# Altium PCB SolenoidController.PcbDoc
Units mil, origin at the board's own origin, x right, y up, seen from the top; angles counter-clockwise.
Board outline 2600 x 4550 mil, 2 copper layers (Top Layer, Bottom Layer); 77 components, 52 nets, 209 pads, 0 vias.
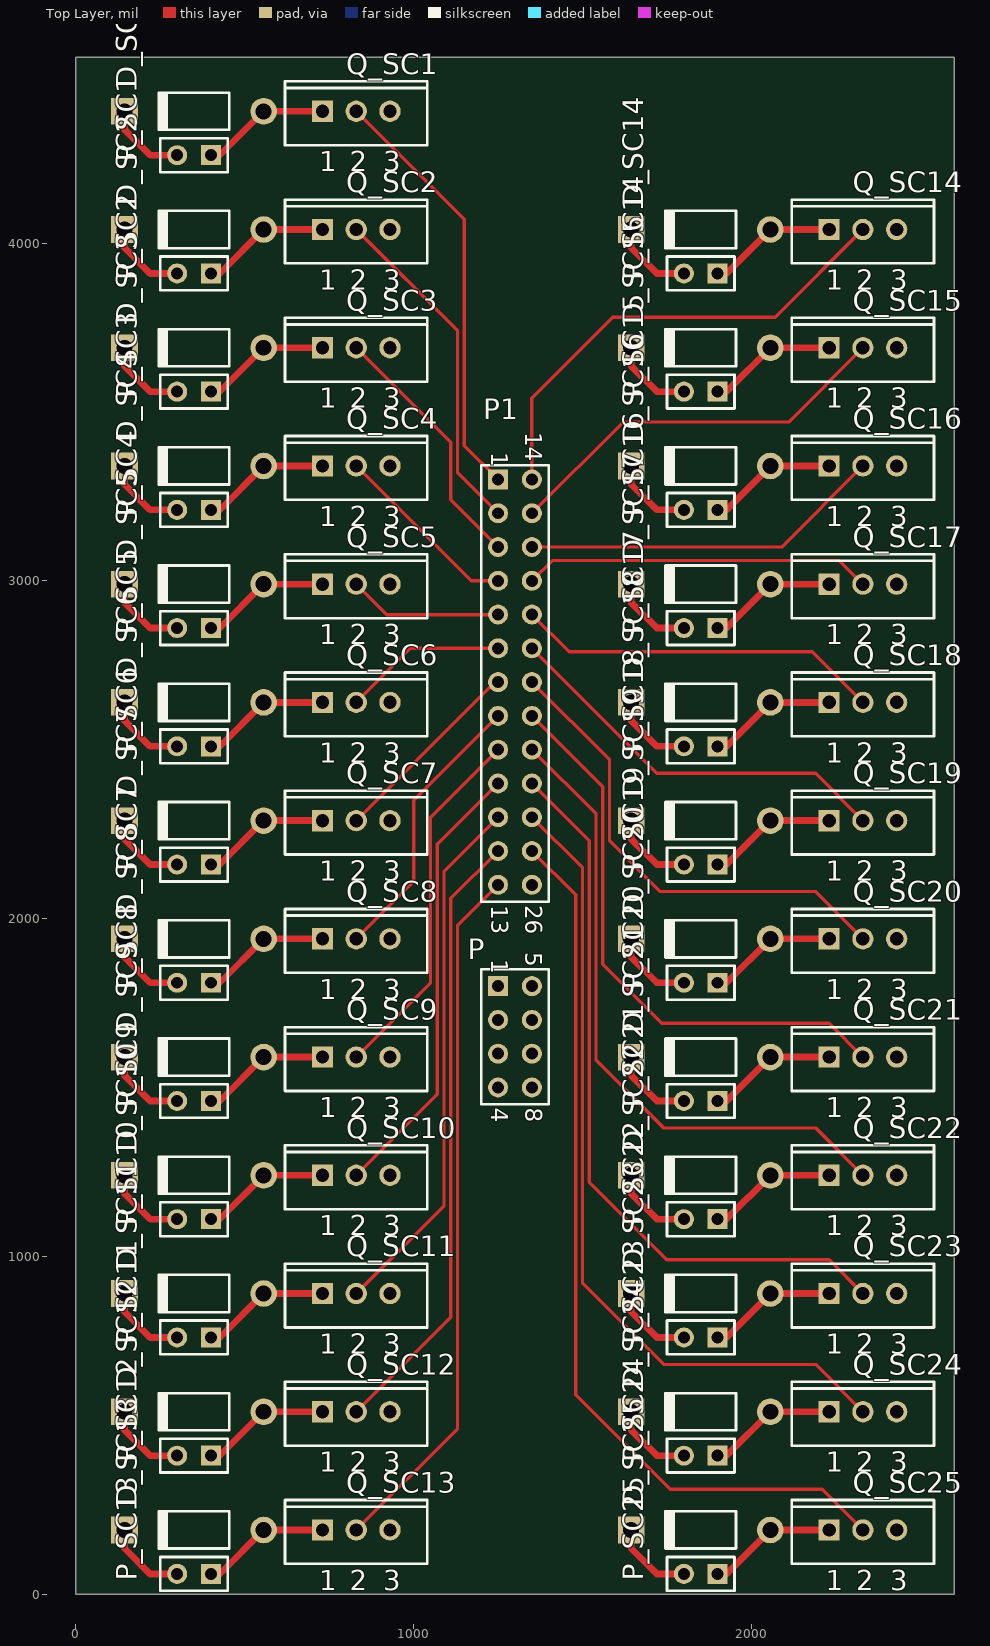
[diagram p0: Top Layer view]
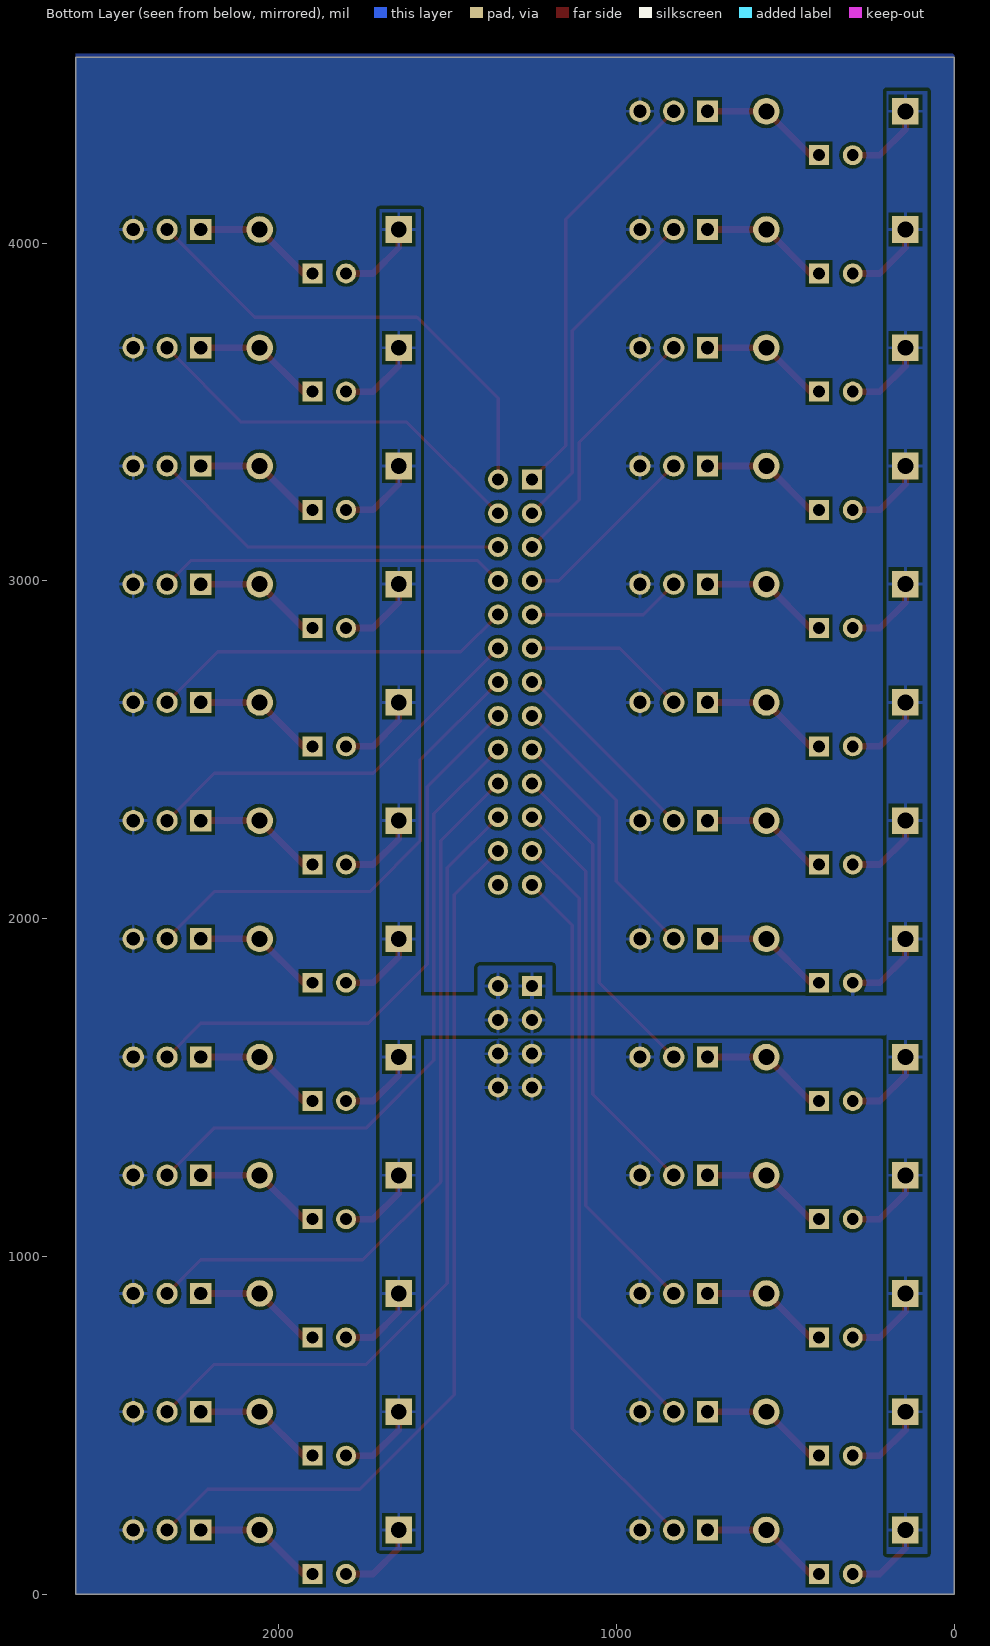
[diagram p1: Bottom Layer view, seen from below]

## Layer stack, top to bottom
Top Solder: solder mask 0.4, Solder Resist, Dk 3.5
Top Layer: signal copper 1.4
Dielectric 1: dielectric 12.6, FR-4, Dk 4.8
Bottom Layer: signal copper 1.4
Bottom Solder: solder mask 0.4, Solder Resist, Dk 3.5

## Board outline
0,0 2600,0 2600,4550 0,4550

## Design rules (kind name [scope] priority, off if disabled: settings)
Clearance [All] p1: gap=10
PolygonConnect [All] p1: connectstyle=Relief reliefconductorwidth=10 reliefentries=4 polygonreliefangle="90 Angle" airgapwidth=10
RoomDefinition topcontroller [InComponentClass('topcontroller')] p1: confinementstyle=ConfineIn formatcopy=TRUE lockcomponents=FALSE outline 1500,3500 1050,3500 1050,1350 1500,1350
RoomDefinition SC25 [InComponentClass('SC25')] p2: confinementstyle=ConfineIn formatcopy=TRUE lockcomponents=FALSE outline 1500,0 2550,0 2550,350 1500,350
RoomDefinition SC24 [InComponentClass('SC24')] p3: confinementstyle=ConfineIn formatcopy=TRUE lockcomponents=FALSE outline 1500,350 2550,350 2550,700 1500,700
RoomDefinition SC23 [InComponentClass('SC23')] p4: confinementstyle=ConfineIn formatcopy=TRUE lockcomponents=FALSE outline 1500,700 2550,700 2550,1050 1500,1050
RoomDefinition SC22 [InComponentClass('SC22')] p5: confinementstyle=ConfineIn formatcopy=TRUE lockcomponents=FALSE outline 1500,1050 2550,1050 2550,1400 1500,1400
RoomDefinition SC21 [InComponentClass('SC21')] p6: confinementstyle=ConfineIn formatcopy=TRUE lockcomponents=FALSE outline 1500,1400 2550,1400 2550,1750 1500,1750
RoomDefinition SC20 [InComponentClass('SC20')] p7: confinementstyle=ConfineIn formatcopy=TRUE lockcomponents=FALSE outline 1500,1750 2550,1750 2550,2100 1500,2100
RoomDefinition SC19 [InComponentClass('SC19')] p8: confinementstyle=ConfineIn formatcopy=TRUE lockcomponents=FALSE outline 1500,2100 2550,2100 2550,2450 1500,2450
RoomDefinition SC18 [InComponentClass('SC18')] p9: confinementstyle=ConfineIn formatcopy=TRUE lockcomponents=FALSE outline 1500,2450 2550,2450 2550,2800 1500,2800
RoomDefinition SC17 [InComponentClass('SC17')] p10: confinementstyle=ConfineIn formatcopy=TRUE lockcomponents=FALSE outline 1500,2800 2550,2800 2550,3150 1500,3150
RoomDefinition SC16 [InComponentClass('SC16')] p11: confinementstyle=ConfineIn formatcopy=TRUE lockcomponents=FALSE outline 1500,3150 2550,3150 2550,3500 1500,3500
RoomDefinition SC15 [InComponentClass('SC15')] p12: confinementstyle=ConfineIn formatcopy=TRUE lockcomponents=FALSE outline 1500,3500 2550,3500 2550,3850 1500,3850
RoomDefinition SC14 [InComponentClass('SC14')] p13: confinementstyle=ConfineIn formatcopy=TRUE lockcomponents=FALSE outline 1500,3850 2550,3850 2550,4200 1500,4200
RoomDefinition SC13 [InComponentClass('SC13')] p14: confinementstyle=ConfineIn formatcopy=TRUE lockcomponents=FALSE outline 0,0 1050,0 1050,350 0,350
RoomDefinition SC12 [InComponentClass('SC12')] p15: confinementstyle=ConfineIn formatcopy=TRUE lockcomponents=FALSE outline 0,350 1050,350 1050,700 0,700
RoomDefinition SC11 [InComponentClass('SC11')] p16: confinementstyle=ConfineIn formatcopy=TRUE lockcomponents=FALSE outline 0,700 1050,700 1050,1050 0,1050
RoomDefinition SC10 [InComponentClass('SC10')] p17: confinementstyle=ConfineIn formatcopy=TRUE lockcomponents=FALSE outline 0,1050 1050,1050 1050,1400 0,1400
RoomDefinition SC9 [InComponentClass('SC9')] p18: confinementstyle=ConfineIn formatcopy=TRUE lockcomponents=FALSE outline 0,1400 1050,1400 1050,1750 0,1750
RoomDefinition SC8 [InComponentClass('SC8')] p19: confinementstyle=ConfineIn formatcopy=TRUE lockcomponents=FALSE outline 0,1750 1050,1750 1050,2100 0,2100
RoomDefinition SC7 [InComponentClass('SC7')] p20: confinementstyle=ConfineIn formatcopy=TRUE lockcomponents=FALSE outline 0,2100 1050,2100 1050,2450 0,2450
RoomDefinition SC6 [InComponentClass('SC6')] p21: confinementstyle=ConfineIn formatcopy=TRUE lockcomponents=FALSE outline 0,2450 1050,2450 1050,2800 0,2800
RoomDefinition SC5 [InComponentClass('SC5')] p22: confinementstyle=ConfineIn formatcopy=TRUE lockcomponents=FALSE outline 0,2800 1050,2800 1050,3150 0,3150
RoomDefinition SC4 [InComponentClass('SC4')] p23: confinementstyle=ConfineIn formatcopy=TRUE lockcomponents=FALSE outline 0,3150 1050,3150 1050,3500 0,3500
RoomDefinition SC3 [InComponentClass('SC3')] p24: confinementstyle=ConfineIn formatcopy=TRUE lockcomponents=FALSE outline 0,3500 1050,3500 1050,3850 0,3850
RoomDefinition SC2 [InComponentClass('SC2')] p25: confinementstyle=ConfineIn formatcopy=TRUE lockcomponents=FALSE outline 0,3850 1050,3850 1050,4200 0,4200
RoomDefinition SC1 [InComponentClass('SC1')] p26: confinementstyle=ConfineIn formatcopy=TRUE lockcomponents=FALSE outline 0,4200 1050,4200 1050,4550 0,4550
RoutingVias [All] p1: holewidth=28 width=50 viastyle="Through Hole" minholewidth=28 minwidth=50 maxholewidth=28 maxwidth=50
SolderMaskExpansion [All] p1: expansion=4
Width [All] p1: maxlimit=20 minlimit=10 preferedwidth=10 minimp=50.000000 maximp=50.000000 favimp=50.000000
30 further rules are at their usual default settings.

## Classes and differential pairs
channel class transistormodule: SC1 SC2 SC3 SC4 SC5 SC6 SC7 SC8 SC9 SC10 SC11 SC12 SC13 SC14 SC15 SC16 SC17 SC18 SC19 SC20 SC21 SC22 SC23 SC24 SC25
net class S[1..25]: S1 S2 S3 S4 S5 S6 S7 S8 S9 S10 S11 S12 S13 S14 S15 S16 S17 S18 S19 S20 S21 S22 S23 S24 S25
component class topcontroller: P P1
component class SC25: D_SC25 P_SC25 Q_SC25
component class SC24: D_SC24 P_SC24 Q_SC24
component class SC23: D_SC23 P_SC23 Q_SC23
component class SC22: D_SC22 P_SC22 Q_SC22
component class SC21: D_SC21 P_SC21 Q_SC21
component class SC20: D_SC20 P_SC20 Q_SC20
component class SC19: D_SC19 P_SC19 Q_SC19
component class SC18: D_SC18 P_SC18 Q_SC18
component class SC17: D_SC17 P_SC17 Q_SC17
component class SC16: D_SC16 P_SC16 Q_SC16
component class SC15: D_SC15 P_SC15 Q_SC15
component class SC14: D_SC14 P_SC14 Q_SC14
component class SC13: D_SC13 P_SC13 Q_SC13
component class SC12: D_SC12 P_SC12 Q_SC12
component class SC11: D_SC11 P_SC11 Q_SC11
component class SC10: D_SC10 P_SC10 Q_SC10
component class SC9: D_SC9 P_SC9 Q_SC9
component class SC8: D_SC8 P_SC8 Q_SC8
component class SC7: D_SC7 P_SC7 Q_SC7
component class SC6: D_SC6 P_SC6 Q_SC6
component class SC5: D_SC5 P_SC5 Q_SC5
component class SC4: D_SC4 P_SC4 Q_SC4
component class SC3: D_SC3 P_SC3 Q_SC3
component class SC2: D_SC2 P_SC2 Q_SC2
component class SC1: D_SC1 P_SC1 Q_SC1

## Components (designator, comment, footprint, x,y, rotation, side; value= is the part's Value field where it differs from the comment)
D_SC1 "Diode 1N4004" DO-41 350,4390 r180 top (schematic designator D)
D_SC2 "Diode 1N4004" DO-41 350,4040 r180 top (schematic designator D)
D_SC3 "Diode 1N4004" DO-41 350,3690 r180 top (schematic designator D)
D_SC4 "Diode 1N4004" DO-41 350,3340 r180 top (schematic designator D)
D_SC5 "Diode 1N4004" DO-41 350,2990 r180 top (schematic designator D)
D_SC6 "Diode 1N4004" DO-41 350,2640 r180 top (schematic designator D)
D_SC7 "Diode 1N4004" DO-41 350,2290 r180 top (schematic designator D)
D_SC8 "Diode 1N4004" DO-41 350,1940 r180 top (schematic designator D)
D_SC9 "Diode 1N4004" DO-41 350,1590 r180 top (schematic designator D)
D_SC10 "Diode 1N4004" DO-41 350,1240 r180 top (schematic designator D)
D_SC11 "Diode 1N4004" DO-41 350,890 r180 top (schematic designator D)
D_SC12 "Diode 1N4004" DO-41 350,540 r180 top (schematic designator D)
D_SC13 "Diode 1N4004" DO-41 350,190 r180 top (schematic designator D)
D_SC14 "Diode 1N4004" DO-41 1850,4040 r180 top (schematic designator D)
D_SC15 "Diode 1N4004" DO-41 1850,3690 r180 top (schematic designator D)
D_SC16 "Diode 1N4004" DO-41 1850,3340 r180 top (schematic designator D)
D_SC17 "Diode 1N4004" DO-41 1850,2990 r180 top (schematic designator D)
D_SC18 "Diode 1N4004" DO-41 1850,2640 r180 top (schematic designator D)
D_SC19 "Diode 1N4004" DO-41 1850,2290 r180 top (schematic designator D)
D_SC20 "Diode 1N4004" DO-41 1850,1940 r180 top (schematic designator D)
D_SC21 "Diode 1N4004" DO-41 1850,1590 r180 top (schematic designator D)
D_SC22 "Diode 1N4004" DO-41 1850,1240 r180 top (schematic designator D)
D_SC23 "Diode 1N4004" DO-41 1850,890 r180 top (schematic designator D)
D_SC24 "Diode 1N4004" DO-41 1850,540 r180 top (schematic designator D)
D_SC25 "Diode 1N4004" DO-41 1850,190 r180 top (schematic designator D)
P "Header 4X2A" HDR2X4_CEN 1250,1800 r270 top
P1 "Header 13X2A" HDR2X13_CEN 1250,3300 r270 top
P_SC1 "Solenoid" HDR1X2 400,4260 r180 top (schematic designator P)
P_SC2 "Solenoid" HDR1X2 400,3910 r180 top (schematic designator P)
P_SC3 "Solenoid" HDR1X2 400,3560 r180 top (schematic designator P)
P_SC4 "Solenoid" HDR1X2 400,3210 r180 top (schematic designator P)
P_SC5 "Solenoid" HDR1X2 400,2860 r180 top (schematic designator P)
P_SC6 "Solenoid" HDR1X2 400,2510 r180 top (schematic designator P)
P_SC7 "Solenoid" HDR1X2 400,2160 r180 top (schematic designator P)
P_SC8 "Solenoid" HDR1X2 400,1810 r180 top (schematic designator P)
P_SC9 "Solenoid" HDR1X2 400,1460 r180 top (schematic designator P)
P_SC10 "Solenoid" HDR1X2 400,1110 r180 top (schematic designator P)
P_SC11 "Solenoid" HDR1X2 400,760 r180 top (schematic designator P)
P_SC12 "Solenoid" HDR1X2 400,410 r180 top (schematic designator P)
P_SC13 "Solenoid" HDR1X2 400,60 r180 top (schematic designator P)
P_SC14 "Solenoid" HDR1X2 1900,3910 r180 top (schematic designator P)
P_SC15 "Solenoid" HDR1X2 1900,3560 r180 top (schematic designator P)
P_SC16 "Solenoid" HDR1X2 1900,3210 r180 top (schematic designator P)
P_SC17 "Solenoid" HDR1X2 1900,2860 r180 top (schematic designator P)
P_SC18 "Solenoid" HDR1X2 1900,2510 r180 top (schematic designator P)
P_SC19 "Solenoid" HDR1X2 1900,2160 r180 top (schematic designator P)
P_SC20 "Solenoid" HDR1X2 1900,1810 r180 top (schematic designator P)
P_SC21 "Solenoid" HDR1X2 1900,1460 r180 top (schematic designator P)
P_SC22 "Solenoid" HDR1X2 1900,1110 r180 top (schematic designator P)
P_SC23 "Solenoid" HDR1X2 1900,760 r180 top (schematic designator P)
P_SC24 "Solenoid" HDR1X2 1900,410 r180 top (schematic designator P)
P_SC25 "Solenoid" HDR1X2 1900,60 r180 top (schematic designator P)
Q_SC1 "MOSFET-N" TO-220-AB 830,4390 r0 top (schematic designator Q)
Q_SC2 "MOSFET-N" TO-220-AB 830,4040 r0 top (schematic designator Q)
Q_SC3 "MOSFET-N" TO-220-AB 830,3690 r0 top (schematic designator Q)
Q_SC4 "MOSFET-N" TO-220-AB 830,3340 r0 top (schematic designator Q)
Q_SC5 "MOSFET-N" TO-220-AB 830,2990 r0 top (schematic designator Q)
Q_SC6 "MOSFET-N" TO-220-AB 830,2640 r0 top (schematic designator Q)
Q_SC7 "MOSFET-N" TO-220-AB 830,2290 r0 top (schematic designator Q)
Q_SC8 "MOSFET-N" TO-220-AB 830,1940 r0 top (schematic designator Q)
Q_SC9 "MOSFET-N" TO-220-AB 830,1590 r0 top (schematic designator Q)
Q_SC10 "MOSFET-N" TO-220-AB 830,1240 r0 top (schematic designator Q)
Q_SC11 "MOSFET-N" TO-220-AB 830,890 r0 top (schematic designator Q)
Q_SC12 "MOSFET-N" TO-220-AB 830,540 r0 top (schematic designator Q)
Q_SC13 "MOSFET-N" TO-220-AB 830,190 r0 top (schematic designator Q)
Q_SC14 "MOSFET-N" TO-220-AB 2330,4040 r0 top (schematic designator Q)
Q_SC15 "MOSFET-N" TO-220-AB 2330,3690 r0 top (schematic designator Q)
Q_SC16 "MOSFET-N" TO-220-AB 2330,3340 r0 top (schematic designator Q)
Q_SC17 "MOSFET-N" TO-220-AB 2330,2990 r0 top (schematic designator Q)
Q_SC18 "MOSFET-N" TO-220-AB 2330,2640 r0 top (schematic designator Q)
Q_SC19 "MOSFET-N" TO-220-AB 2330,2290 r0 top (schematic designator Q)
Q_SC20 "MOSFET-N" TO-220-AB 2330,1940 r0 top (schematic designator Q)
Q_SC21 "MOSFET-N" TO-220-AB 2330,1590 r0 top (schematic designator Q)
Q_SC22 "MOSFET-N" TO-220-AB 2330,1240 r0 top (schematic designator Q)
Q_SC23 "MOSFET-N" TO-220-AB 2330,890 r0 top (schematic designator Q)
Q_SC24 "MOSFET-N" TO-220-AB 2330,540 r0 top (schematic designator Q)
Q_SC25 "MOSFET-N" TO-220-AB 2330,190 r0 top (schematic designator Q)

## Footprints (in the part's own frame and the unit in brackets; to place one, negate y for a bottom-side part, rotate by r counter-clockwise, add the part's x,y. Pads: shape width x height; smd on the part's side, far side on the other; paste and mask are expansions set on the pad)
DO-41 [mm] "Diode, Axial; Body 5.2 x 2.7 mm (LxDia. max), Lead Dia. 0.86 mm (max)"
  round 2 hole 1.2: 1(-5.23,0)
  rect 2x2 hole 1.2: 2(5.23,0)
  silkscreen extent -2.65,-1.4 2.75,1.4
HDR1X2 [mm] "Connector; Header; 2 Position"
  rect 1.5x1.5 hole 0.9: 1(0,0)
  round 1.5 hole 0.9: 2(2.54,0)
  silkscreen extent -1.27,-1.27 3.81,1.27
HDR2X4_CEN [mm] "Connector; Header; 4x2 Position"
  rect 1.5x1.5 hole 0.9: 1(0,0)
  round 1.5 hole 0.9: 2(2.54,0) 3(5.08,0) 4(7.62,0) 5(0,2.54) 6(2.54,2.54) 7(5.08,2.54) 8(7.62,2.54)
  silkscreen extent -1.27,-1.27 8.89,3.81
HDR2X13_CEN [mm] "Connector; Header; 13x2 Position"
  rect 1.5x1.5 hole 0.9: 1(0,0)
  round 1.5 hole 0.9: 2(2.54,0) 3(5.08,0) 4(7.62,0) 5(10.16,0) 6(12.7,0) 7(15.24,0) 8(17.78,0) 9(20.32,0) 10(22.86,0) 11(25.4,0) 12(27.94,0) 13(30.48,0) 14(0,2.54) 15(2.54,2.54) 16(5.08,2.54) 17(7.62,2.54) 18(10.16,2.54) 19(12.7,2.54) 20(15.24,2.54) 21(17.78,2.54) 22(20.32,2.54) 23(22.86,2.54) 24(25.4,2.54) 25(27.94,2.54) 26(30.48,2.54)
  silkscreen extent -1.06,-1.27 31.75,3.81
TO-220-AB [mm] "TO, Thru-Hole, Vertical, Heatsink Mounted; 3 In-Line Leads; Pitch 2.54 mm"
  rect 1.6x1.6 hole 1: 1(-2.54,0)
  round 1.6 hole 1: 2(0,0) 3(2.54,0)
  silkscreen extent -5.35,-2.55 5.35,2.25

## Part data
D_SC1 D_SC2 D_SC3 D_SC4 D_SC5 D_SC6 D_SC7 D_SC8 D_SC9 D_SC10 D_SC11 D_SC12 D_SC13 D_SC14 D_SC15 D_SC16 D_SC17 D_SC18 D_SC19 D_SC20 D_SC21 D_SC22 D_SC23 D_SC24 D_SC25: "1 Amp General Purpose Rectifier"
P: "Header, 4-Pin, Dual row"
P1: "Header, 13-Pin, Dual row"
P_SC1 P_SC2 P_SC3 P_SC4 P_SC5 P_SC6 P_SC7 P_SC8 P_SC9 P_SC10 P_SC11 P_SC12 P_SC13 P_SC14 P_SC15 P_SC16 P_SC17 P_SC18 P_SC19 P_SC20 P_SC21 P_SC22 P_SC23 P_SC24 P_SC25: library part "Header 2", "Header, 2-Pin"
Q_SC1 Q_SC2 Q_SC3 Q_SC4 Q_SC5 Q_SC6 Q_SC7 Q_SC8 Q_SC9 Q_SC10 Q_SC11 Q_SC12 Q_SC13 Q_SC14 Q_SC15 Q_SC16 Q_SC17 Q_SC18 Q_SC19 Q_SC20 Q_SC21 Q_SC22 Q_SC23 Q_SC24 Q_SC25: "N-Channel MOSFET"

## Nets (pads, with @x,y where several pads share a name; then routed paths per layer and width w, separated by ;. In a path a pad name is that pad's centre, name@x,y a point inside that pad or via, vN(x,y) a via of type N, cw(c..) or ccw(c..) an arc to the next point about the centre after c; other vN are vias at no path point)
GND: P.3 P.4 P.7 P.8 Q_SC1.3 Q_SC2.3 Q_SC3.3 Q_SC4.3 Q_SC5.3 Q_SC6.3 Q_SC7.3 Q_SC8.3 Q_SC9.3 Q_SC10.3 Q_SC11.3 Q_SC12.3 Q_SC13.3 Q_SC14.3 Q_SC15.3 Q_SC16.3 Q_SC17.3 Q_SC18.3 Q_SC19.3 Q_SC20.3 Q_SC21.3 Q_SC22.3 Q_SC23.3 Q_SC24.3 Q_SC25.3
NetD_SC1_1: D_SC1.1 P_SC1.1 Q_SC1.1 | length 383.8
  Top Layer w20: P_SC1.1 425.91,4260 D_SC1.1 Q_SC1.1
NetD_SC2_1: D_SC2.1 P_SC2.1 Q_SC2.1 | length 383.8
  Top Layer w20: P_SC2.1 425.91,3910 D_SC2.1 Q_SC2.1
NetD_SC3_1: D_SC3.1 P_SC3.1 Q_SC3.1 | length 383.8
  Top Layer w20: P_SC3.1 425.91,3560 D_SC3.1 Q_SC3.1
NetD_SC4_1: D_SC4.1 P_SC4.1 Q_SC4.1 | length 383.8
  Top Layer w20: P_SC4.1 425.91,3210 D_SC4.1 Q_SC4.1
NetD_SC5_1: D_SC5.1 P_SC5.1 Q_SC5.1 | length 383.8
  Top Layer w20: P_SC5.1 425.91,2860 D_SC5.1 Q_SC5.1
NetD_SC6_1: D_SC6.1 P_SC6.1 Q_SC6.1 | length 383.8
  Top Layer w20: P_SC6.1 425.91,2510 D_SC6.1 Q_SC6.1
NetD_SC7_1: D_SC7.1 P_SC7.1 Q_SC7.1 | length 383.8
  Top Layer w20: P_SC7.1 425.91,2160 D_SC7.1 Q_SC7.1
NetD_SC8_1: D_SC8.1 P_SC8.1 Q_SC8.1 | length 383.8
  Top Layer w20: P_SC8.1 425.91,1810 D_SC8.1 Q_SC8.1
NetD_SC9_1: D_SC9.1 P_SC9.1 Q_SC9.1 | length 383.8
  Top Layer w20: P_SC9.1 425.91,1460 D_SC9.1 Q_SC9.1
NetD_SC10_1: D_SC10.1 P_SC10.1 Q_SC10.1 | length 383.8
  Top Layer w20: P_SC10.1 425.91,1110 D_SC10.1 Q_SC10.1
NetD_SC11_1: D_SC11.1 P_SC11.1 Q_SC11.1 | length 383.8
  Top Layer w20: P_SC11.1 425.91,760 D_SC11.1 Q_SC11.1
NetD_SC12_1: D_SC12.1 P_SC12.1 Q_SC12.1 | length 383.8
  Top Layer w20: P_SC12.1 425.91,410 D_SC12.1 Q_SC12.1
NetD_SC13_1: D_SC13.1 P_SC13.1 Q_SC13.1 | length 383.8
  Top Layer w20: P_SC13.1 425.91,60 D_SC13.1 Q_SC13.1
NetD_SC14_1: D_SC14.1 P_SC14.1 Q_SC14.1 | length 383.8
  Top Layer w20: P_SC14.1 1925.91,3910 D_SC14.1 Q_SC14.1
NetD_SC15_1: D_SC15.1 P_SC15.1 Q_SC15.1 | length 383.8
  Top Layer w20: P_SC15.1 1925.91,3560 D_SC15.1 Q_SC15.1
NetD_SC16_1: D_SC16.1 P_SC16.1 Q_SC16.1 | length 383.8
  Top Layer w20: P_SC16.1 1925.91,3210 D_SC16.1 Q_SC16.1
NetD_SC17_1: D_SC17.1 P_SC17.1 Q_SC17.1 | length 383.8
  Top Layer w20: P_SC17.1 1925.91,2860 D_SC17.1 Q_SC17.1
NetD_SC18_1: D_SC18.1 P_SC18.1 Q_SC18.1 | length 383.8
  Top Layer w20: P_SC18.1 1925.91,2510 D_SC18.1 Q_SC18.1
NetD_SC19_1: D_SC19.1 P_SC19.1 Q_SC19.1 | length 383.8
  Top Layer w20: P_SC19.1 1925.91,2160 D_SC19.1 Q_SC19.1
NetD_SC20_1: D_SC20.1 P_SC20.1 Q_SC20.1 | length 383.8
  Top Layer w20: P_SC20.1 1925.91,1810 D_SC20.1 Q_SC20.1
NetD_SC21_1: D_SC21.1 P_SC21.1 Q_SC21.1 | length 383.8
  Top Layer w20: P_SC21.1 1925.91,1460 D_SC21.1 Q_SC21.1
NetD_SC22_1: D_SC22.1 P_SC22.1 Q_SC22.1 | length 383.8
  Top Layer w20: P_SC22.1 1925.91,1110 D_SC22.1 Q_SC22.1
NetD_SC23_1: D_SC23.1 P_SC23.1 Q_SC23.1 | length 383.8
  Top Layer w20: P_SC23.1 1925.91,760 D_SC23.1 Q_SC23.1
NetD_SC24_1: D_SC24.1 P_SC24.1 Q_SC24.1 | length 383.8
  Top Layer w20: P_SC24.1 1925.91,410 D_SC24.1 Q_SC24.1
NetD_SC25_1: D_SC25.1 P_SC25.1 Q_SC25.1 | length 383.8
  Top Layer w20: P_SC25.1 1925.91,60 D_SC25.1 Q_SC25.1
PWR+: D_SC1.2 D_SC2.2 D_SC3.2 D_SC4.2 D_SC5.2 D_SC6.2 D_SC7.2 D_SC8.2 D_SC9.2 D_SC10.2 D_SC11.2 D_SC12.2 D_SC13.2 D_SC14.2 D_SC15.2 D_SC16.2 D_SC17.2 D_SC18.2 D_SC19.2 D_SC20.2 D_SC21.2 D_SC22.2 D_SC23.2 D_SC24.2 D_SC25.2 P.1 P.2 P.5 P.6 P_SC1.2 P_SC2.2 P_SC3.2 P_SC4.2 P_SC5.2 P_SC6.2 P_SC7.2 P_SC8.2 P_SC9.2 P_SC10.2 P_SC11.2 P_SC12.2 P_SC13.2 P_SC14.2 P_SC15.2 P_SC16.2 P_SC17.2 P_SC18.2 P_SC19.2 P_SC20.2 P_SC21.2 P_SC22.2 P_SC23.2 P_SC24.2 P_SC25.2 | length 6036
  Top Layer w20: D_SC13.2 144.09,135.91 220,60 P_SC13.2 ; D_SC12.2 144.09,485.91 220,410 P_SC12.2 ; D_SC11.2 144.09,835.91 220,760 P_SC11.2 ; D_SC10.2 144.09,1185.91 220,1110 P_SC10.2 ; D_SC9.2 144.09,1535.91 220,1460 P_SC9.2 ; D_SC8.2 144.09,1885.91 220,1810 P_SC8.2 ; D_SC7.2 144.09,2235.91 220,2160 P_SC7.2 ; D_SC6.2 144.09,2585.91 220,2510 P_SC6.2 ; D_SC5.2 144.09,2935.91 220,2860 P_SC5.2 ; D_SC4.2 144.09,3285.91 220,3210 P_SC4.2 ; D_SC3.2 144.09,3635.91 220,3560 P_SC3.2 ; D_SC2.2 144.09,3985.91 220,3910 P_SC2.2 ; D_SC1.2 144.09,4335.91 220,4260 P_SC1.2 ; D_SC25.2 1644.09,135.91 1720,60 P_SC25.2 ; D_SC24.2 1644.09,485.91 1720,410 P_SC24.2 ; D_SC23.2 1644.09,835.91 1720,760 P_SC23.2 ; D_SC22.2 1644.09,1185.91 1720,1110 P_SC22.2 ; D_SC21.2 1644.09,1535.91 1720,1460 P_SC21.2 ; D_SC20.2 1644.09,1885.91 1720,1810 P_SC20.2 ; D_SC19.2 1644.09,2235.91 1720,2160 P_SC19.2 ; D_SC18.2 1644.09,2585.91 1720,2510 P_SC18.2 ; D_SC17.2 1644.09,2935.91 1720,2860 P_SC17.2 ; D_SC16.2 1644.09,3285.91 1720,3210 P_SC16.2 ; D_SC15.2 1644.09,3635.91 1720,3560 P_SC15.2 ; D_SC14.2 1644.09,3985.91 1720,3910 P_SC14.2
S1: P1.1 Q_SC1.2 | length 1264
  Top Layer w10: Q_SC1.2 1150,4070 1150,3400 P1.1
S2: P1.2 Q_SC2.2 | length 1014
  Top Layer w10: Q_SC2.2 1130,3740 1130,3320 P1.2
S3: P1.3 Q_SC3.2 | length 764
  Top Layer w10: Q_SC3.2 1110,3410 1110,3240 P1.3
S4: P1.4 Q_SC4.2 | length 560.8
  Top Layer w10: Q_SC4.2 1170,3000 P1.4
S5: P1.5 Q_SC5.2 | length 457.3
  Top Layer w10: Q_SC5.2 920,2900 P1.5
S6: P1.6 Q_SC6.2 | length 486.3
  Top Layer w10: Q_SC6.2 990,2800 P1.6
S7: P1.7 Q_SC7.2 | length 589.8
  Top Layer w10: Q_SC7.2 1240,2700 P1.7
S8: P1.8 Q_SC8.2 | length 834
  Top Layer w10: Q_SC8.2 1000,2110 1000,2350 P1.8
S9: P1.9 Q_SC9.2 | length 1084
  Top Layer w10: Q_SC9.2 1050,1810 1050,2300 P1.9
S10: P1.10 Q_SC10.2 | length 1334
  Top Layer w10: Q_SC10.2 1070,1480 1070,2220 P1.10
S11: P1.11 Q_SC11.2 | length 1584
  Top Layer w10: Q_SC11.2 1090,1150 1090,2140 P1.11
S12: P1.12 Q_SC12.2 | length 1834
  Top Layer w10: Q_SC12.2 1110,820 1110,2060 P1.12
S13: P1.13 Q_SC13.2 | length 2084
  Top Layer w10: Q_SC13.2 1130,490 1130,1980 P1.13
S14: P1.14 Q_SC14.2 | length 1427.1
  Top Layer w10: P1.14 1350,3540 1590,3780 2070,3780 Q_SC14.2
S15: P1.15 Q_SC15.2 | length 1183
  Top Layer w10: P1.15 1620,3470 2110,3470 Q_SC15.2
S16: P1.16 Q_SC16.2 | length 1079.4
  Top Layer w10: P1.16 2090,3100 Q_SC16.2
S17: P1.17 Q_SC17.2 | length 1033.8
  Top Layer w10: P1.17 1410,3060 2260,3060 Q_SC17.2
S18: P1.18 Q_SC18.2 | length 1087.7
  Top Layer w10: P1.18 1460,2790 2180,2790 Q_SC18.2
S19: P1.19 Q_SC19.2 | length 1191.2
  Top Layer w10: P1.19 1720,2430 2190,2430 Q_SC19.2
S20: P1.20 Q_SC20.2 | length 1435.4
  Top Layer w10: P1.20 1580,2470 1580,2230 1730,2080 2190,2080 Q_SC20.2
S21: P1.21 Q_SC21.2 | length 1706.3
  Top Layer w10: P1.21 1560,2390 1560,1864.37 1734.37,1690 2230,1690 Q_SC21.2
S22: P1.22 Q_SC22.2 | length 1929.5
  Top Layer w10: P1.22 1540,2310 1540,1580 1740,1380 2190,1380 Q_SC22.2
S23: P1.23 Q_SC23.2 | length 2197.1
  Top Layer w10: P1.23 1520,2230 1520,1220 1750,990 2230,990 Q_SC23.2
S24: P1.24 Q_SC24.2 | length 2429.5
  Top Layer w10: P1.24 1500,2150 1500,920 1740,680 2190,680 Q_SC24.2
S25: P1.25 Q_SC25.2 | length 2679.5
  Top Layer w10: P1.25 1480,2070 1480,590 1760,310 2210,310 Q_SC25.2
pads on no net: P1.26

## Polygon pours and split planes (outlines as drawn)
PWR+ on Bottom Layer "Bottom Layer - PWR+ 4" (solid, remove dead copper, pour order 8): 200,1655 1699.91,1655 1700.14,1771.49 201.49,1771.49 200,1770
PWR+ on Bottom Layer "Bottom Layer - PWR+ 3" (solid, remove dead copper, pour order 6): 1190,1860 1410,1860 1410,1655 1190,1655
PWR+ on Bottom Layer "Bottom Layer - PWR+ 2" (solid, remove dead copper, pour order 4): 80,4450 200,4450 200,120 80,120
PWR+ on Bottom Layer "Bottom Layer - PWR+ 1" (solid, remove dead copper, pour order 2): 1579.61,4100 1579.61,130 1700,130 1700,4100
GND on Bottom Layer "Bottom Layer - GND" (solid, remove dead copper, pour order 10): 0,0 2600,0 2600,4560 0,4560

## Text inside footprints (layer, text, board x,y; h text height)
P: Top Overlay "5" at 1330,1900 h50 r270; Top Overlay "1" at 1230,1880 h50 r270; Top Overlay "4" at 1230,1440 h50 r270; Top Overlay "8" at 1330,1440 h50 r270
P1: Top Overlay "26" at 1330,2040 h50 r270; Top Overlay "13" at 1230,2040 h50 r270; Top Overlay "14" at 1330,3440 h50 r270; Top Overlay "1" at 1230,3380 h50 r270
Q_SC1: Top Overlay "1" at 720.16,4211.85 h59.06; Top Overlay "2" at 810.31,4211.85 h59.06; Top Overlay "3" at 910.31,4211.85 h59.06
Q_SC2: Top Overlay "1" at 720.16,3861.85 h59.06; Top Overlay "2" at 810.31,3861.85 h59.06; Top Overlay "3" at 910.31,3861.85 h59.06
Q_SC3: Top Overlay "1" at 720.16,3511.85 h59.06; Top Overlay "2" at 810.31,3511.85 h59.06; Top Overlay "3" at 910.31,3511.85 h59.06
Q_SC4: Top Overlay "1" at 720.16,3161.85 h59.06; Top Overlay "2" at 810.31,3161.85 h59.06; Top Overlay "3" at 910.31,3161.85 h59.06
Q_SC5: Top Overlay "1" at 720.16,2811.85 h59.06; Top Overlay "2" at 810.31,2811.85 h59.06; Top Overlay "3" at 910.31,2811.85 h59.06
Q_SC6: Top Overlay "1" at 720.16,2461.85 h59.06; Top Overlay "2" at 810.31,2461.85 h59.06; Top Overlay "3" at 910.31,2461.85 h59.06
Q_SC7: Top Overlay "1" at 720.16,2111.85 h59.06; Top Overlay "2" at 810.31,2111.85 h59.06; Top Overlay "3" at 910.31,2111.85 h59.06
Q_SC8: Top Overlay "1" at 720.16,1761.85 h59.06; Top Overlay "2" at 810.31,1761.85 h59.06; Top Overlay "3" at 910.31,1761.85 h59.06
Q_SC9: Top Overlay "1" at 720.16,1411.85 h59.06; Top Overlay "2" at 810.31,1411.85 h59.06; Top Overlay "3" at 910.31,1411.85 h59.06
Q_SC10: Top Overlay "1" at 720.16,1061.85 h59.06; Top Overlay "2" at 810.31,1061.85 h59.06; Top Overlay "3" at 910.31,1061.85 h59.06
Q_SC11: Top Overlay "1" at 720.16,711.85 h59.06; Top Overlay "2" at 810.31,711.85 h59.06; Top Overlay "3" at 910.31,711.85 h59.06
Q_SC12: Top Overlay "1" at 720.16,361.85 h59.06; Top Overlay "2" at 810.31,361.85 h59.06; Top Overlay "3" at 910.31,361.85 h59.06
Q_SC13: Top Overlay "1" at 720.16,11.85 h59.06; Top Overlay "2" at 810.31,11.85 h59.06; Top Overlay "3" at 910.31,11.85 h59.06
Q_SC14: Top Overlay "1" at 2220.16,3861.85 h59.06; Top Overlay "2" at 2310.32,3861.85 h59.06; Top Overlay "3" at 2410.32,3861.85 h59.06
Q_SC15: Top Overlay "1" at 2220.16,3511.85 h59.06; Top Overlay "2" at 2310.32,3511.85 h59.06; Top Overlay "3" at 2410.32,3511.85 h59.06
Q_SC16: Top Overlay "1" at 2220.16,3161.85 h59.06; Top Overlay "2" at 2310.32,3161.85 h59.06; Top Overlay "3" at 2410.32,3161.85 h59.06
Q_SC17: Top Overlay "1" at 2220.16,2811.85 h59.06; Top Overlay "2" at 2310.32,2811.85 h59.06; Top Overlay "3" at 2410.32,2811.85 h59.06
Q_SC18: Top Overlay "1" at 2220.16,2461.85 h59.06; Top Overlay "2" at 2310.32,2461.85 h59.06; Top Overlay "3" at 2410.32,2461.85 h59.06
Q_SC19: Top Overlay "1" at 2220.16,2111.85 h59.06; Top Overlay "2" at 2310.32,2111.85 h59.06; Top Overlay "3" at 2410.32,2111.85 h59.06
Q_SC20: Top Overlay "1" at 2220.16,1761.85 h59.06; Top Overlay "2" at 2310.32,1761.85 h59.06; Top Overlay "3" at 2410.32,1761.85 h59.06
Q_SC21: Top Overlay "1" at 2220.16,1411.85 h59.06; Top Overlay "2" at 2310.32,1411.85 h59.06; Top Overlay "3" at 2410.32,1411.85 h59.06
Q_SC22: Top Overlay "1" at 2220.16,1061.85 h59.06; Top Overlay "2" at 2310.32,1061.85 h59.06; Top Overlay "3" at 2410.32,1061.85 h59.06
Q_SC23: Top Overlay "1" at 2220.16,711.85 h59.06; Top Overlay "2" at 2310.32,711.85 h59.06; Top Overlay "3" at 2410.32,711.85 h59.06
Q_SC24: Top Overlay "1" at 2220.16,361.85 h59.06; Top Overlay "2" at 2310.32,361.85 h59.06; Top Overlay "3" at 2410.32,361.85 h59.06
Q_SC25: Top Overlay "1" at 2220.16,11.85 h59.06; Top Overlay "2" at 2310.32,11.85 h59.06; Top Overlay "3" at 2410.32,11.85 h59.06